# EAGLE board MLDCA201_COVER (EAGLE 9.5.2)
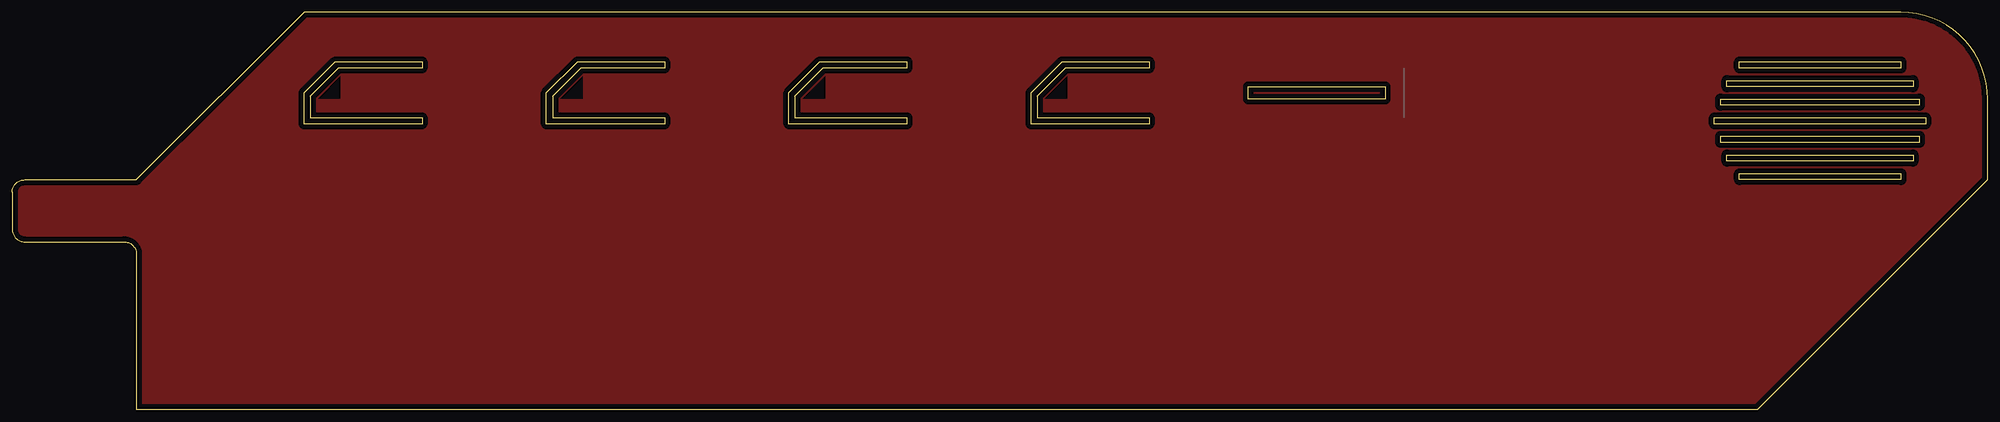
[diagram p0: board, top side]

Size 403.86 x 81.28 mm. Coordinates in mm from the lower left corner, seen from the top.
Outline: 22.86,34.29 arc-90 25.4,31.75
Outline: 403.86,63.5 403.86,46.99 356.87,0 25.4,0 25.4,31.75
Outline: 403.86,63.5 arc90 386.08,81.28
Outline: 403.86,63.5 arc90 386.08,81.28
Outline: 22.86,34.29 2.54,34.29 arc-90 0,36.83 0,44.45 arc-90 2.54,46.99 25.4,46.99 59.69,81.28 386.08,81.28
Outline: 22.86,34.29 arc-90 25.4,31.75
Outline: 83.82,69.85 66.67,69.85 60.96,64.14 60.96,59.69 83.82,59.69 83.82,58.42 59.69,58.42 59.69,64.77 66.04,71.12 83.82,71.12 83.82,69.85
Outline: 133.35,69.85 116.2,69.85 110.49,64.14 110.49,59.69 133.35,59.69 133.35,58.42 109.22,58.42 109.22,64.77 115.57,71.12 133.35,71.12 133.35,69.85
Outline: 182.88,69.85 165.74,69.85 160.02,64.14 160.02,59.69 182.88,59.69 182.88,58.42 158.75,58.42 158.75,64.77 165.1,71.12 182.88,71.12 182.88,69.85
Outline: 232.41,69.85 215.26,69.85 209.55,64.14 209.55,59.69 232.41,59.69 232.41,58.42 208.28,58.42 208.28,64.77 214.63,71.12 232.41,71.12 232.41,69.85
Outline: 353.06,71.12 386.08,71.12 386.08,69.85 353.06,69.85 353.06,71.12
Outline: 350.52,67.31 388.62,67.31 388.62,66.04 350.52,66.04 350.52,67.31
Outline: 349.25,63.5 389.89,63.5 389.89,62.23 349.25,62.23 349.25,63.5
Outline: 347.98,59.69 391.16,59.69 391.16,58.42 347.98,58.42 347.98,59.69
Outline: 386.08,46.99 353.06,46.99 353.06,48.26 386.08,48.26 386.08,46.99
Outline: 388.62,50.8 350.52,50.8 350.52,52.07 388.62,52.07 388.62,50.8
Outline: 389.89,54.61 349.25,54.61 349.25,55.88 389.89,55.88 389.89,54.61
Outline: 252.73,66.04 280.67,66.04 280.67,63.5 252.73,63.5 252.73,66.04
Copper layers (1*16): Top 0.035mm / dielectric 1.5mm / Bottom 0.035mm
Design rules "default": minimum track width 6mil, minimum drill 0.35mm, track to track 6mil, track to pad 6mil, pad to pad 6mil, via to via 6mil, smd to smd 6mil, copper to edge 40mil, drill to drill 6mil, minimum pad ring 10mil, minimum via ring 8mil, stop-mask expansion 4mil, vias tented up to drill 0mil, thermal gap 10mil

## Placement (x,y rotation side)
U$2  [#MIDI#0]  214.63,66.04 0 top
U$3  [MLDCA#2010]  316.23,67.31 0 top
U$4  [#SYNTHETIC_MELODICA#0]  316.23,62.23 0 top
U$5  [#VX1#0]  66.04,66.04 0 top
U$6  [#VX2#0]  115.57,66.04 0 top
U$7  [#VX3#0]  165.1,66.04 0 top

## Library data of the parts
U$2-U$7 = output

## Tracks (layer width: path | path; a pad name or v marks a point on that pad's centre or on a via)
PLATE
  pour Top (isolate 0.305): 41.91,63.5 403.86,63.5 403.86,46.99 356.87,0 25.4,0 25.4,31.75 arc90 22.86,34.29 2.54,34.29 arc-90 0,36.83 0,44.45 arc-90 2.54,46.99 3.81,46.99 25.4,46.99
  pour Top (isolate 0.305): 41.91,63.5 59.69,81.28 386.08,81.28 arc-90 403.86,63.5 215.9,63.5 215.9,68.58 210.82,63.5 166.37,63.5 166.37,68.58 161.29,63.5 116.84,63.5 116.84,68.58 111.76,63.5 67.31,63.5 67.31,68.58 62.23,63.5